# EAGLE board gimbal (EAGLE 6.5.0)
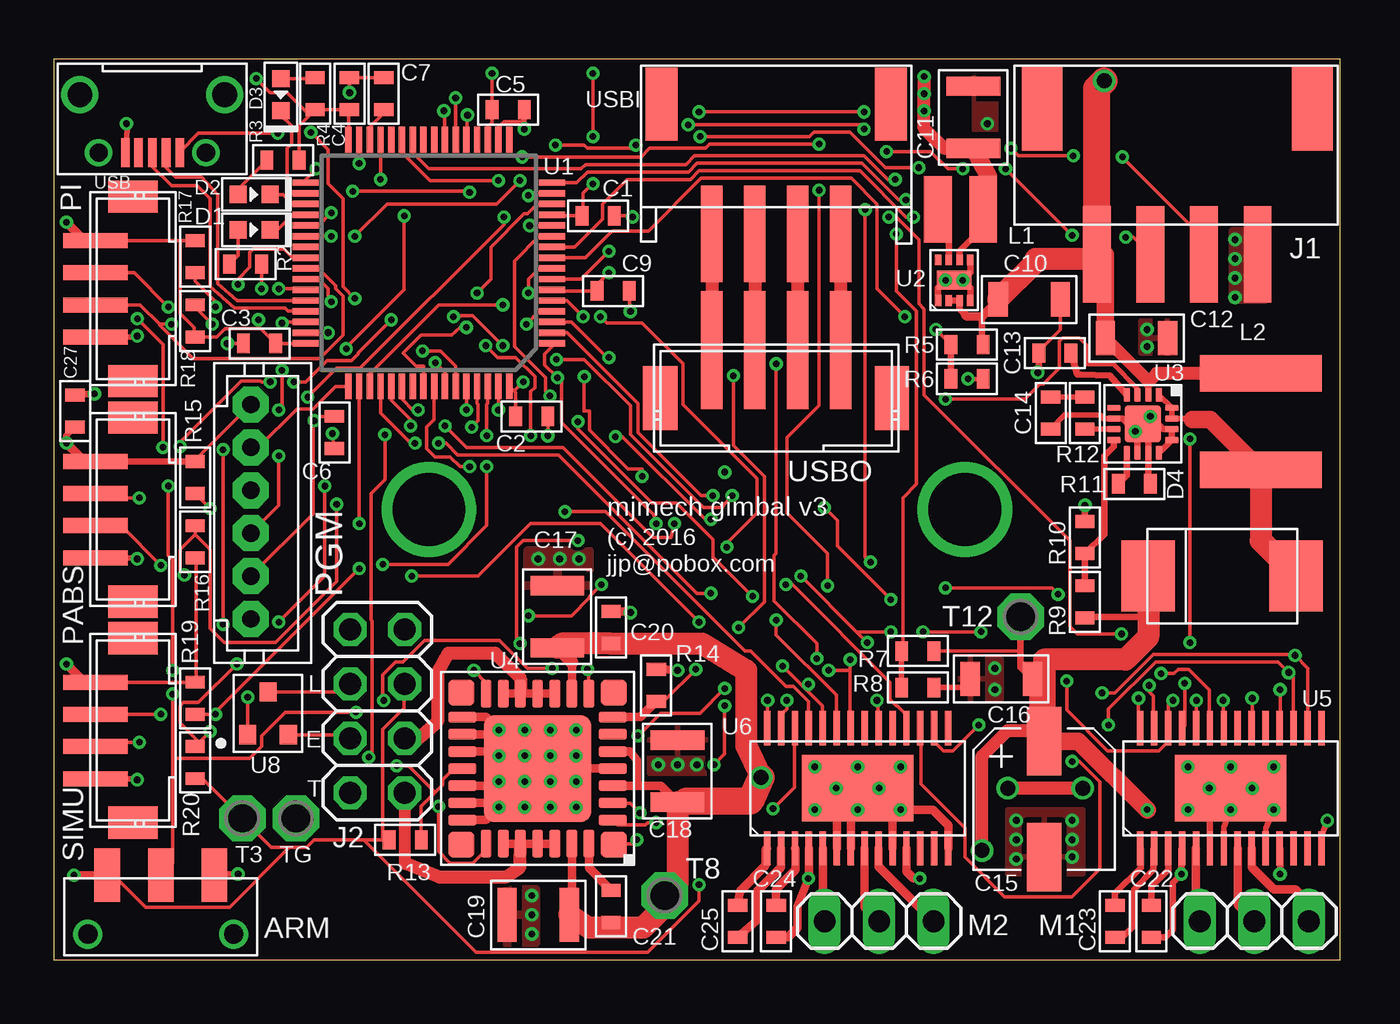
[diagram p0: board, top side]
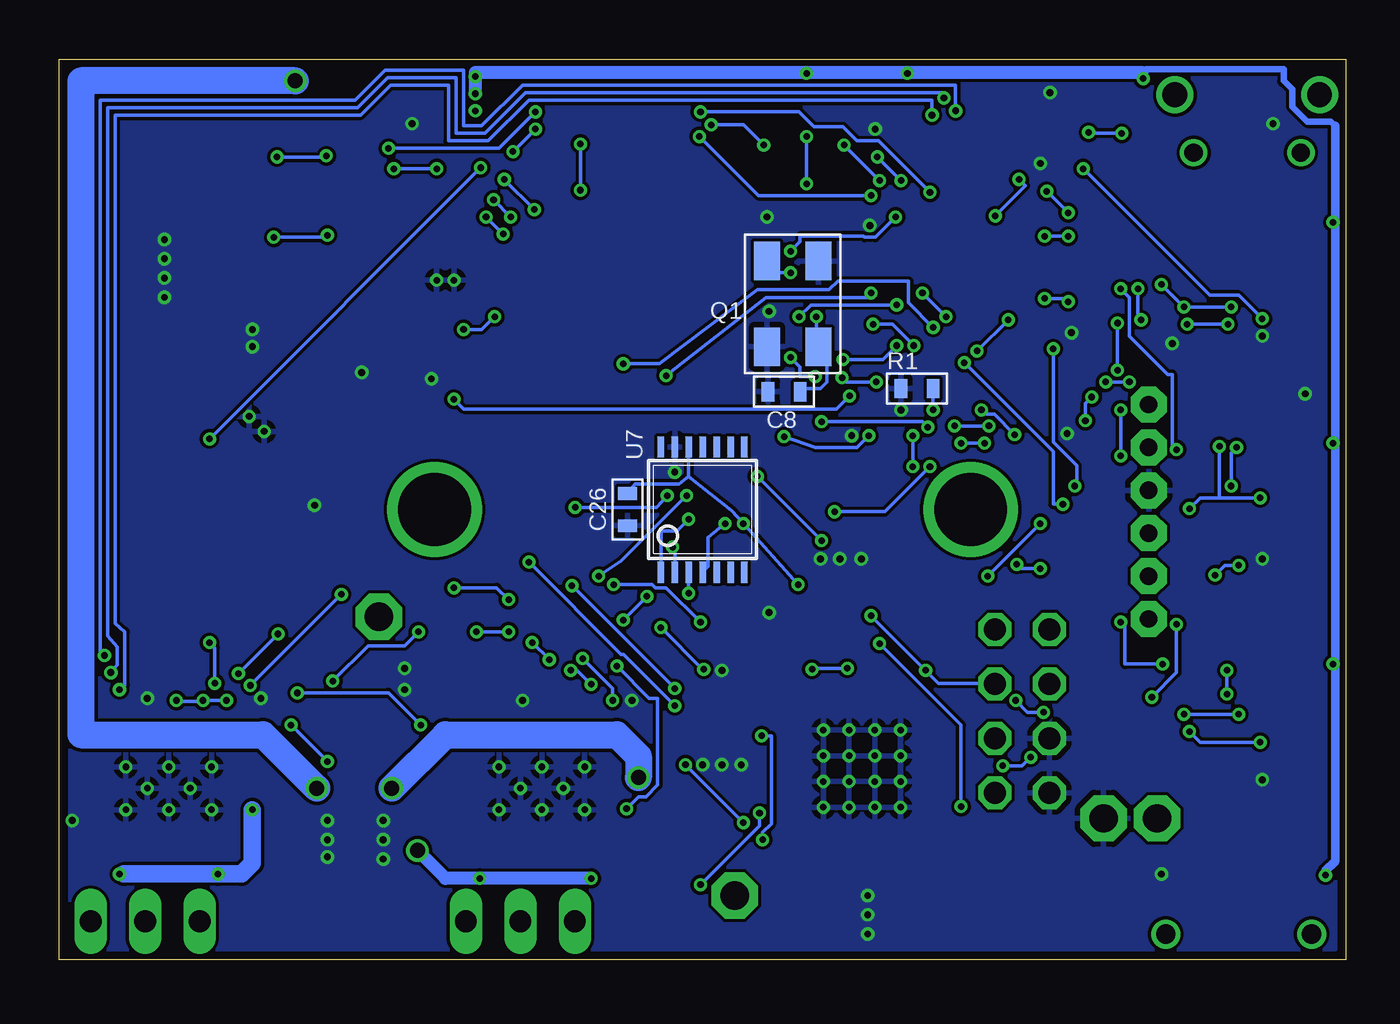
[diagram p1: board, bottom side, seen from below]

Size 60 x 42 mm. Coordinates in mm from the lower left corner, seen from the top.
Outline: 0,0 60,0 60,42 0,42 0,0
Copper layers (1*16): Top 0.035mm / dielectric 0.2mm / Bottom 0.035mm
Design rules "MF_2_Layer *": minimum track width 6mil, minimum drill 12mil, track to track 6mil, track to pad 6mil, pad to pad 6mil, via to via 6mil, smd to smd 0mil, copper to edge 10mil, drill to drill 10mil, minimum pad ring 6mil, minimum via ring 6mil, stop-mask expansion 2mil, vias tented up to drill 25mil, thermal gap 10mil

## Footprints (pad centres in the part's own frame; a part is rotated, then mirrored left to right if it is on the bottom)
JS_SUB_SWITCH = smd 1.2 x 2.5: 1 -2.5,2.75; 2 0,2.75; 3 2.5,2.75 | drill 0.9: G0 -3.4,0; G1 3.4,0
C0603 = smd 0.6 x 0.9: P$1 -0.75,0; P$2 0.75,0
C1206 = smd 0.9 x 1.6: P$1 -1.45,0; P$2 1.45,0
C1210 = smd 0.9 x 2.5: P$1 -1.45,0; P$2 1.45,0
CP6.3MM = smd 1.6 x 3.2: P$1 0,-2.7; P$2 0,2.7
LED0603 = smd 0.8 x 0.8: ANODE 0.75,0; CATHODE -0.75,0
B520C = smd 2.5 x 3.3: 1 -3.45,0; 2 3.45,0
JST_XH_SMT_RA_4 = smd 1.3 x 4.5: 1 -3.75,4.6; 2 -1.25,4.6; 3 1.25,4.6; 4 3.75,4.6 | smd 1.9 x 3.9: SHLD1 -6.3,-2.2; SHLD2 6.3,-2.2
2X04 = drill 1.016 octagon: 1 -3.81,-1.27; 2 -3.81,1.27; 3 -1.27,-1.27; 4 -1.27,1.27; 5 1.27,-1.27; 6 1.27,1.27; 7 3.81,-1.27; 8 3.81,1.27
L_SMT_1212 = smd 1.3 x 3.1: P$1 -1.05,0; P$2 1.05,0
ASPI-6045S = smd 1.7 x 5.7: 1 -2.25,0; 2 2.25,0
1X03 = drill 1.016 long: 1 -2.54,0; 2 0,0; 3 2.54,0
M3_MOTOR_MOUNT = drill 3.4: P$1 0,0
JST_ZH_SMT_VERT_4 = smd 0.7 x 3: 1 -2.25,-0.75; 2 -0.75,-0.75; 3 0.75,-0.75; 4 2.25,-0.75 | smd 1.5 x 2.3: SHLD1 -4.3,1; SHLD2 4.3,1
JST-PH6 = drill 0.813 pad 1.676 octagon: 1 5,0; 2 3,0; 3 1,0; 4 -1,0; 5 -3,0; 6 -5,0
ABM3B = smd 1.8 x 1.2: 1 -2,-1.2; 2 2,-1.2; 3 2,1.2; 4 -2,1.2
R0603 = smd 0.6 x 0.9: P$1 -0.75,0; P$2 0.75,0
P1-13 = drill 1.321 pad 2.159 octagon: TP 0,0
LQFP64 = smd 1.2 x 0.3: 1 -5.75,3.75; 2 -5.75,3.25; 3 -5.75,2.75; 4 -5.75,2.25; 5 -5.75,1.75; 6 -5.75,1.25; 7 -5.75,0.75; 8 -5.75,0.25; 9 -5.75,-0.25; 10 -5.75,-0.75; 11 -5.75,-1.25; 12 -5.75,-1.75; 13 -5.75,-2.25; 14 -5.75,-2.75; 15 -5.75,-3.25; 16 -5.75,-3.75; 33 5.75,-3.75; 34 5.75,-3.25; 35 5.75,-2.75; 36 5.75,-2.25; 37 5.75,-1.75; 38 5.75,-1.25; 39 5.75,-0.75; 40 5.75,-0.25; 41 5.75,0.25; 42 5.75,0.75; 43 5.75,1.25; 44 5.75,1.75; 45 5.75,2.25; 46 5.75,2.75; 47 5.75,3.25; 48 5.75,3.75 | smd 0.3 x 1.2: 17 -3.75,-5.75; 18 -3.25,-5.75; 19 -2.75,-5.75; 20 -2.25,-5.75; 21 -1.75,-5.75; 22 -1.25,-5.75; 23 -0.75,-5.75; 24 -0.25,-5.75; 25 0.25,-5.75; 26 0.75,-5.75; 27 1.25,-5.75; 28 1.75,-5.75; 29 2.25,-5.75; 30 2.75,-5.75; 31 3.25,-5.75; 32 3.75,-5.75; 49 3.75,5.75; 50 3.25,5.75; 51 2.75,5.75; 52 2.25,5.75; 53 1.75,5.75; 54 1.25,5.75; 55 0.75,5.75; 56 0.25,5.75; 57 -0.25,5.75; 58 -0.75,5.75; 59 -1.25,5.75; 60 -1.75,5.75; 61 -2.25,5.75; 62 -2.75,5.75; 63 -3.25,5.75; 64 -3.75,5.75
PWSON8 = smd 0.5 x 0.3: 1 -0.95,0.75; 2 -0.95,0.25; 3 -0.95,-0.25; 4 -0.95,-0.75; 5 0.95,-0.75; 6 0.95,-0.25; 7 0.95,0.25; 8 0.95,0.75 | smd 0.9 x 1.6: G0 0,0 | drill 0.305 pad 0.61: G1 0,0.4; G2 0,-0.4
PQFN16 = smd 0.65 x 0.3: 1 -1.35,0.75; 2 -1.35,0.25; 3 -1.35,-0.25; 4 -1.35,-0.75; 9 1.35,-0.75; 10 1.35,-0.25; 11 1.35,0.25; 12 1.35,0.75 | smd 0.3 x 0.65: 5 -0.75,-1.35; 6 -0.25,-1.35; 7 0.25,-1.35; 8 0.75,-1.35; 13 0.75,1.35; 14 0.25,1.35; 15 -0.25,1.35; 16 -0.75,1.35 | smd 1.7 x 1.7: G0 0,0 | drill 0.305: G1 -0.35,0.35; G2 0.35,-0.35
PQFN32 = smd 1.2 x 1.2: 1 -3.55,3.55; 9 -3.55,-3.55; 17 3.55,-3.55; 25 3.55,3.55 | smd 1.3 x 0.5: 2 -3.5,2.4; 3 -3.5,1.6; 4 -3.5,0.8; 5 -3.5,0; 6 -3.5,-0.8; 7 -3.5,-1.6; 8 -3.5,-2.4; 18 3.5,-2.4; 19 3.5,-1.6; 20 3.5,-0.8; 21 3.5,0; 22 3.5,0.8; 23 3.5,1.6; 24 3.5,2.4 | smd 0.5 x 1.3: 10 -2.4,-3.5; 11 -1.6,-3.5; 12 -0.8,-3.5; 13 0,-3.5; 14 0.8,-3.5; 15 1.6,-3.5; 16 2.4,-3.5; 26 2.4,3.5; 27 1.6,3.5; 28 0.8,3.5; 29 0,3.5; 30 -0.8,3.5; 31 -1.6,3.5; 32 -2.4,3.5 | smd 5 x 5: G0 0,0 | drill 0.305: G1 -1.8,1.8; G2 -0.6,1.8; G3 0.6,1.8; G4 1.8,1.8; G5 -1.8,0.6; G6 -0.6,0.6; G7 0.6,0.6; G8 1.8,0.6; G9 -1.8,-0.6; G10 -0.6,-0.6; G11 0.6,-0.6; G12 1.8,-0.6; G13 -1.8,-1.8; G14 -0.6,-1.8; G15 0.6,-1.8; G16 1.8,-1.8
HTSSOP28 = smd 1.6 x 0.3: 1 -2.8,4.225; 2 -2.8,3.575; 3 -2.8,2.925; 4 -2.8,2.275; 5 -2.8,1.625; 6 -2.8,0.975; 7 -2.8,0.325; 8 -2.8,-0.325; 9 -2.8,-0.975; 10 -2.8,-1.625; 11 -2.8,-2.275; 12 -2.8,-2.925; 13 -2.8,-3.575; 14 -2.8,-4.225; 15 2.8,-4.225; 16 2.8,-3.575; 17 2.8,-2.925; 18 2.8,-2.275; 19 2.8,-1.625; 20 2.8,-0.975; 21 2.8,-0.325; 22 2.8,0.325; 23 2.8,0.975; 24 2.8,1.625; 25 2.8,2.275; 26 2.8,2.925; 27 2.8,3.575; 28 2.8,4.225 | smd 3.1 x 5.2: G0 0,0 | drill 0.305: G1 -1,2; G2 1,2; G3 0,1; G4 -1,0; G5 1,0; G6 0,-1; G7 -1,-2; G8 1,-2
TSSOP14 = smd 0.305 x 0.991: 1 -1.95,-2.918; 2 -1.3,-2.918; 3 -0.65,-2.918; 4 0,-2.918; 5 0.65,-2.918; 6 1.3,-2.918; 7 1.95,-2.918; 8 1.95,2.918; 9 1.3,2.918; 10 0.65,2.918; 11 0,2.918; 12 -0.65,2.918; 13 -1.3,2.918; 14 -1.95,2.918
SOT-23-3 = smd 0.8 x 0.9: P$1 -0.95,-1; P$2 0.95,-1; P$3 0,1
FCI_MICROUSB_SMT_RA = smd 0.4 x 1.35: 1 -1.3,1.5; 2 -0.65,1.5; 3 0,1.5; 4 0.65,1.5; 5 1.25,1.5 | drill 0.85: G0 -2.5,1.5; G1 2.5,1.5 | drill 1.15: G2 -3.375,-1.2; G3 3.375,-1.2
JST_PH_SMT_RA_4 = smd 1 x 4.5: 1 -3,2.75; 2 -1,2.75; 3 1,2.75; 4 3,2.75 | smd 1.5 x 3.4: SHLD1 -5.35,-3.3; SHLD2 5.35,-3.3
JST_PH_SMT_VERT_4 = smd 1 x 5.5: 1 -3,-1.75; 2 -1,-1.75; 3 1,-1.75; 4 3,-1.75 | smd 1.6 x 3: SHLD1 -5.4,0.5; SHLD2 5.4,0.5

## Placement (x,y rotation side)
ARM  SLIDE_SWITCHJS_SUB_SWITCH  [JS_SUB_SWITCH]  5,1.2 0 top
C1  4.7uF  [C0603]  25.4,34.7 0 top
C2  0.1uF  [C0603]  22.3,25.35 0 top
C3  0.1uF  [C0603]  9.6,28.75 180 top
C4  0.1uF  [C0603]  13.8,40.4 90 top
C5  0.1uF  [C0603]  21.2,39.65 0 top
C6  0.1uF  [C0603]  13.1,24.6 270 top
C7  4.7uF  [C0603]  15.4,40.4 90 top
C8  10pF  [C0603]  26.2,26.5 180 bottom
C9  10pF  [C0603]  26.1,31.2 0 top
C10  10uF  [C1206]  45.5,30.8 0 top
C11  22uF 16V  [C1210]  42.9,39.3 90 top
C12  10uF  [C1206]  50.5,29 0 top
C13  0.047uF  [C0603]  46.7,28.3 180 top
C14  0.1uF  [C0603]  46.5,25.5 270 top
C15  100uF  [CP6.3MM]  46.2,7.5 180 top
C16  10uF  [C1206]  44.2,13.1 180 top
C17  22uF 16V  [C1210]  23.5,16 90 top
C18  22uF 16V  [C1210]  29.1,8.8 90 top
C19  22uF 16V  [C1210]  22.6,2.1 180 top
C20  0.1uF  [C0603]  26,15.5 90 top
C21  0.1uF  [C0603]  26,2.5 90 top
C22  0.1uF  [C0603]  51.2,1.8 90 top
C23  0.01uF  [C0603]  49.5,1.8 270 top
C24  0.1uF  [C0603]  33.7,1.8 90 top
C25  0.01uF  [C0603]  31.9,1.8 270 top
C26  0.1uF  [C0603]  33.5,21 270 bottom
C27  0.1uF  [C0603]  1,25.6 90 top
D1  [LED0603]  9.35,34.05 180 top
D2  [LED0603]  9.35,35.7 180 top
D3  [LED0603]  10.6,40.35 90 top
D4  DIODEB520C  [B520C]  54.5,17.9 0 top
J1  JST-XH4SMT_RA  [JST_XH_SMT_RA_4]  52.4,37.5 180 top
J2  [2X04]  15.1,11.6 90 top
L1  2.2uH  [L_SMT_1212]  42.3,35 0 top
L2  2.2uH  [ASPI-6045S]  56.3,25.1 270 top
M1  [1X03]  56,1.8 0 top
M2  [1X03]  38.5,1.8 0 top
MOUNT1  M3_MOTOR_MOUNT  [M3_MOTOR_MOUNT]  42.5,21 0 top
MOUNT2  M3_MOTOR_MOUNT  [M3_MOTOR_MOUNT]  17.5,21 0 top
PABS  JST-ZH4  [JST_ZH_SMT_VERT_4]  2.7,21 270 top
PGM  JST-PH6JST-PH6  [JST-PH6]  9.2,20.9 270 top
PI  JST-ZH4  [JST_ZH_SMT_VERT_4]  2.7,31.3 270 top
Q1  [ABM3B]  25.8,30.6 90 bottom
R1  10  [R0603]  20,26.65 0 bottom
R2  560  [R0603]  8.95,32.45 0 top
R3  560  [R0603]  10.7,37.3 0 top
R4  560  [R0603]  12.2,40.4 270 top
R5  100k  [R0603]  42.6,28.7 0 top
R6  10k  [R0603]  42.6,27.1 180 top
R7  100k  [R0603]  40.3,14.4 0 top
R8  10k  [R0603]  40.3,12.7 180 top
R9  88.7k  [R0603]  48.1,16.7 270 top
R10  10k  [R0603]  48.1,19.7 270 top
R11  78.7k  [R0603]  50.4,22.2 180 top
R12  1.87k  [R0603]  48.1,25.5 270 top
R13  100k  [R0603]  16.4,5.6 180 top
R14  220  [R0603]  28.1,12.8 270 top
R15  1.69k  [R0603]  6.6,22.5 90 top
R16  1.69k  [R0603]  6.6,19.5 270 top
R17  1.69k  [R0603]  6.6,32.8 90 top
R18  1.69k  [R0603]  6.6,29.8 270 top
R19  1.69k  [R0603]  6.6,12.2 90 top
R20  1.69k  [R0603]  6.6,9.2 270 top
SIMU  JST-ZH4  [JST_ZH_SMT_VERT_4]  2.7,10.7 270 top
T3  TPPAD1-13  [P1-13]  8.8,6.6 0 top
T8  TPPAD1-13  [P1-13]  28.5,3 0 top
T12  TPPAD1-13  [P1-13]  45.1,16 0 top
TG  TPPAD1-13  [P1-13]  11.3,6.6 0 top
U1  STM32F4R_64PIN  [LQFP64]  17.5,32.5 180 top
U2  TPS62172PWSON8  [PWSON8]  42,31.7 90 top
U3  TPS55330PQFN16  [PQFN16]  50.8,25 270 top
U4  MC33926  [PQFN32]  22.57,8.92 180 top
U5  DRV8313  [HTSSOP28]  54.9,8 90 top
U6  DRV8313  [HTSSOP28]  37.5,8 90 top
U7  AS5048A  [TSSOP14]  30,21 0 bottom
U8  [SOT-23-3]  10,11.5 0 top
USB  MICRO-USB  [FCI_MICROUSB_SMT_RA]  4.6,39.15 180 top
USBI  [JST_PH_SMT_RA_4]  33.7,36.6 180 top
USBO  [JST_PH_SMT_VERT_4]  33.7,26.7 180 top

## Library data of the parts
ARM = gimbal; AMFPN: JS102011SAQN; DPN: 401-1999-1-ND
C1 C7 = mfpassives; AMFPN: CC0603KRX5R6BB475; DPN: 311-1455-1-ND; MFG#: N/A; TEMP_COF: N/A; TOLERANCE: N/A; VOLTAGE: N/A
C2-C6 C14 C20-C22 C24 C26 C27 = mfpassives; AMFPN: MF-CAP-0603-0.1uF; MFG#: N/A; TEMP_COF: N/A; TOLERANCE: N/A; VOLTAGE: N/A
C8 C9 = mfpassives; AMFPN: MF-CAP-0603-10pF; MFG#: N/A; TEMP_COF: N/A; TOLERANCE: N/A; VOLTAGE: N/A
C10 C12 C16 = mfpassives; AMFPN: MF-CAP-1206-10uF; MFG#: N/A; TEMP_COF: N/A; TOLERANCE: N/A; VOLTAGE: N/A
C11 C17-C19 = mfpassives; AMFPN: C3225X7R1C226M250AC; DPN: 445-3955-1-ND; MFG#: N/A; TEMP_COF: N/A; TOLERANCE: N/A; VOLTAGE: N/A
C13 = mfpassives; AMFPN: GRM188R71E473KA01D; DPN: 490-1522-1-ND; MFG#: N/A; TEMP_COF: N/A; TOLERANCE: N/A; VOLTAGE: N/A
C15 = mfpassives; AMFPN: MF-CAP-6.3MM-100uF; MFG#: N/A; TOLERANCE: N/A; VOTLAGE: N/A
C23 C25 = mfpassives; AMFPN: MF-CAP-0603-0.01uF; MFG#: N/A; TEMP_COF: N/A; TOLERANCE: N/A; VOLTAGE: N/A
D1 = mfleds; AMFPN: MF-LED-0603-GREEN; MFG#: N/A
D2 D3 = mfleds; AMFPN: MF-LED-0603-RED; MFG#: N/A
D4 = gimbal; AMFPN: B520C-13-F; DPN: B520C-FDICT-ND
J1 = gimbal; AMFPN: S4B-XH-SM4-TB(LF)(SN); DPN: 455-2262-1-ND
J2 M1 M2 = pinhead
L1 = gimbal; AMFPN: LQH3NPN2R2MJ0L; DPN: 490-6638-1-ND
L2 = gimbal; AMFPN: ASPI-6045S-2R2N-T; DPN: ASPI-6045S-2R2N-TCT-ND
MOUNT1 MOUNT2 = gimbal
PABS PI SIMU = gimbal; AMFPN: B4B-ZR-SM4-TF(LF)(SN); DPN: 455-1683-1-ND
PGM = gimbal; AMFPN: B6B-PH-K-S(LF)(SN); DPN: 455-1708-ND
Q1 = gimbal; AMFPN: ABM3B-8.000MHZ-10-1-U-T; DPN: 535-9721-1-ND
R1 = mfpassives; AMFPN: MF-RES-0603-10; MFG#: N/A; TOLERANCE: N/A; VOLTAGE: N/A; WATTAGE: N/A
R2-R4 = mfpassives; AMFPN: MF-RES-0603-560; MFG#: N/A; TOLERANCE: N/A; VOLTAGE: N/A; WATTAGE: N/A
R5 R7 R13 = mfpassives; AMFPN: ERJ-3EKF1003V; DPN: P100KHCT-ND; MFG#: N/A; TOLERANCE: N/A; VOLTAGE: N/A; WATTAGE: N/A
R6 R8 = mfpassives; AMFPN: ERJ-3EKF1002V; DPN: P10.0KHCT-ND; MFG#: N/A; TOLERANCE: N/A; VOLTAGE: N/A; WATTAGE: N/A
R9 = mfpassives; AMFPN: ERJ-3EKF8872V; DPN: P88.7KHCT-ND; MFG#: N/A; TOLERANCE: N/A; VOLTAGE: N/A; WATTAGE: N/A
R10 = mfpassives; AMFPN: P10.0KHCT-ND; DPN: P10.0KHCT-ND; MFG#: N/A; TOLERANCE: N/A; VOLTAGE: N/A; WATTAGE: N/A
R11 = mfpassives; AMFPN: ERJ-3EKF7872V; DPN: P78.7KHCT-ND; MFG#: N/A; TOLERANCE: N/A; VOLTAGE: N/A; WATTAGE: N/A
R12 = mfpassives; AMFPN: ERJ-3EKF1871V; DPN: P1.87KHCT-ND; MFG#: N/A; TOLERANCE: N/A; VOLTAGE: N/A; WATTAGE: N/A
R14 = mfpassives; AMFPN: ERJ-3EKF2200V; DPN: P220HCT-ND; MFG#: N/A; TOLERANCE: N/A; VOLTAGE: N/A; WATTAGE: N/A
R15-R20 = mfpassives; AMFPN: MF-RES-0603-1.69K; MFG#: N/A; TOLERANCE: N/A; VOLTAGE: N/A; WATTAGE: N/A
T3 T8 T12 TG = testpad
U1 = gimbal; AMFPN: STM32F411RET6; DPN: 497-14909-ND
U2 = gimbal; AMFPN: TPS62172DSGT; DPN: 296-29879-1-ND
U3 = gimbal; AMFPN: TPS55330RTET; DPN: 296-36219-1-ND
U4 = gimbal; AMFPN: MC33926PNBR2; DPN: MC33926PNBR2CT-ND
U5 U6 = gimbal; AMFPN: DRV8313PWP; DPN: 296-35540-5-ND
U7 = gimbal; AMFPN: AS5048A-HTSP-500; DPN: AS5048A-HTSP-500CT-ND
U8 = mfdiscrete; AMFPN: MF-DSC-SOT233-BSS138
USB = gimbal; AMFPN: 10118194-0001LF; DPN: 609-4618-1-ND
USBI = gimbal; AMFPN: S4B-PH-SM4-TB(LF)(SN); DPN: 455-1751-1-ND
USBO = gimbal; AMFPN: B4B-PH-SM4-TB(LF)(SN); DPN: 455-1736-1-ND

## Nets
+3V3: ARM.1 C1.P$1 C2.P$1 C3.P$1 C4.P$1 C5.P$1 C11.P$1 C26.P$1 C27.P$1 J2.5 L1.P$2 PABS.1 PGM.6 PI.1 R2.P$2 R3.P$2 R4.P$2 R13.P$2 R15.P$2 R16.P$2 R17.P$2 R18.P$2 R19.P$2 R20.P$2 SIMU.1 T3.TP U1.1 U1.13 U1.19 U1.32 U1.48 U1.64 U2.6 U4.3 U4.16 U7.12
+8V: C10.P$1 C12.P$1 C17.P$1 C18.P$1 C19.P$1 C20.P$1 C21.P$1 J1.4 L2.1 R5.P$2 T8.TP U2.2 U2.3 U3.2 U4.4 U4.6 U4.11 U4.31
+12V: C15.P$1 C16.P$1 C22.P$1 C24.P$1 D4.1 R7.P$2 R9.P$2 T12.TP U5.4 U5.11 U6.4 U6.11
AEG_PWM: U1.26 U4.2
AGITATOR_PWM: U1.27 U4.1
AS5048_CS: U1.4 U7.1
AS5048_MISO: U1.52 U7.3
AS5048_MOSI: U1.53 U7.4
AS5048_SCK: U1.51 U7.2
BLDC_EN: U1.2 U5.22 U5.24 U5.26 U6.22 U6.24 U6.26
BLDC_FAULT1: U1.21 U5.18
BLDC_FAULT2: U1.50 U6.18
BLDC_RESET/: U1.23 U5.16 U6.16
BLDC_SLEEP/: U1.22 U5.17 U6.17
BOOST_EN: U1.11 U3.3
GND: ARM.3 C1.P$2 C2.P$2 C3.P$2 C4.P$2 C5.P$2 C6.P$2 C7.P$2 C8.P$2 C9.P$2 C10.P$2 C11.P$2 C12.P$2 C13.P$2 C14.P$2 C15.P$2 C16.P$2 C17.P$2 C18.P$2 C19.P$2 C20.P$2 C26.P$2 C27.P$2 J1.1 J2.2 J2.4 PABS.4 PGM.4 PI.4 Q1.2 Q1.4 R1.P$1 R6.P$1 R8.P$1 R10.P$1 R11.P$1 R14.P$1 SIMU.4 TG.TP U1.12 U1.18 U1.31 U1.47 U1.63 U2.1 U2.4 U2.5 U2.G0 U2.G1 U2.G2 U3.6 U3.10 U3.11 U3.12 U3.13 U3.14 U3.G0 U3.G1 U3.G2 U4.5 U4.18 U4.19 U4.20 U4.22 U4.23 U4.24 U4.G0 U4.G1 U4.G2 U4.G3 U4.G4 U4.G5 U4.G6 U4.G7 U4.G8 U4.G9 U4.G10 U4.G11 U4.G12 U4.G13 U4.G14 U4.G15 U4.G16 U5.6 U5.7 U5.10 U5.14 U5.20 U5.28 U5.G0 U5.G1 U5.G2 U5.G3 U5.G4 U5.G5 U5.G6 U5.G7 U5.G8 U6.6 U6.7 U6.10 U6.14 U6.20 U6.28 U6.G0 U6.G1 U6.G2 U6.G3 U6.G4 U6.G5 U6.G6 U6.G7 U6.G8 U7.13 U8.P$2 USB.5
LASER_EN: U1.43 U8.P$1
MOTOR1_IN1: U1.14 U5.27
MOTOR1_IN2: U1.15 U5.25
MOTOR1_IN3: U1.16 U5.23
MOTOR2_IN1: U1.56 U6.27
MOTOR2_IN2: U1.57 U6.25
MOTOR2_IN3: U1.61 U6.23
MOTOR_D1: U1.3 U4.26
MOTOR_EN: ARM.2 U1.33 U4.10
MOTOR_FB: R14.P$2 U1.8 U4.8
MOTOR_SF: R13.P$1 U1.54 U4.21
N$1: J2.6 U8.P$3
N$2: J2.3 U4.12 U4.13 U4.14 U4.15
N$3: J2.1 U4.27 U4.28 U4.29 U4.30
N$5: C21.P$2 U4.32
N$6: M1.1 U5.5
N$7: M1.2 U5.8
N$8: M1.3 U5.9
N$9: M2.1 U6.5
N$10: M2.2 U6.8
N$11: M2.3 U6.9
N$12: USBI.1 USBO.1
N$13: USBI.2 USBO.2
N$14: USBI.3 USBO.3
N$15: USBI.4 USBO.4
N$16: L1.P$1 U2.7
N$17: D4.2 L2.2 U3.1 U3.15 U3.16
N$18: R11.P$2 U3.9
N$19: C14.P$1 R12.P$1
N$20: R12.P$2 U3.7
N$21: C13.P$1 U3.4
N$22: R9.P$1 R10.P$2 U3.8
N$23: C7.P$1 U1.30
N$24: C6.P$1 PGM.2 U1.7
N$25: C25.P$1 U6.1
N$26: C25.P$2 U6.2
N$27: C23.P$2 U5.2
N$28: C23.P$1 U5.1
N$29: C22.P$2 U5.3
N$30: C24.P$2 U6.3
N$31: PGM.5 U1.49
N$32: PGM.3 U1.46
N$33: R1.P$2 U1.60
N$34: R5.P$1 R6.P$2 U1.9
N$35: C8.P$1 Q1.1 U1.5
N$36: C9.P$1 Q1.3 U1.6
N$37: D2.CATHODE U1.35
N$38: R7.P$1 R8.P$2 U1.10
N$39: D1.ANODE R2.P$1
N$40: D2.ANODE R3.P$1
N$41: D3.ANODE R4.P$1
N$42: D3.CATHODE U1.34
N$43: D1.CATHODE U1.36
PABS_SCL: PABS.3 R16.P$1 U1.58
PABS_SDA: PABS.2 R15.P$1 U1.59
PIMU_SCL: PI.3 R18.P$1 U1.41
PIMU_SDA: PI.2 R17.P$1 U1.40
SIMU_SCL: R20.P$1 SIMU.3 U1.29
SIMU_SDA: R19.P$1 SIMU.2 U1.62
SLAVE_RX: J1.3 U1.38
SLAVE_TX: J1.2 U1.37
USB_DM: U1.44 USB.2
USB_DP: U1.45 USB.3
USB_VBUS: U1.42 USB.1

## Tracks (layer width: path | path; a pad name or v marks a point on that pad's centre or on a via)
+3V3  (via drill 0.3)
  Top 0.152: 9.55,29.45 9.65,29.45 C3.P$1 U1.48 | 9.55,29.45 8,29.45 7.6,29.05 R18.P$2 6.55,29.1 6.55,29.5 5.9,30.15 5.9,33.55 | v9.7,31.3 R2.P$2 | 9.55,29.45 v9.55,29.85 | R3.P$2 11.45,38.9 R4.P$2 | R4.P$2 C4.P$1 13.75,39.6 U1.32 | SIMU.1 R19.P$2 6.65,13 6.65,18.7 R16.P$2 | U1.13 23.3,34.7 C1.P$1 24.7,34.75 24.7,35.75 v25.15,36.2 | U1.19 20.25,38.85 20.45,39.05 C5.P$1 v20.45,41.35 | PI.1 5.9,33.55 | 5.9,33.55 R17.P$2 | v25.15,41.35 v25.15,38.4 | v9.45,41.1 10.1,40.45 10.9,40.45 11.9,39.45 R4.P$2 | C2.P$1 21.55,26.45 21.48,26.52 | U1.64 21.48,26.52 | U1.1 23.25,28.6 22.9,28.25 22.9,27.75 v23.5,27.15 23.7,26.95 23.7,25.05 28,20.75 v28.1,20.35 | 21.48,26.52 v21.9,26.95 | v19.6,13.5 20.15,12.95 20.15,12.5 U4.16 | 14.5,5.6 12.15,5.6 11.8,5.25 10.95,5.25 | 14.5,5.6 15.35,5.6 | 15.35,5.6 R13.P$2 | 10.95,5.25 10.15,5.25 T3.TP 6.95,8.45 R20.P$2 | v27.35,6.85 26.9,7.3 26.1,7.3 U4.3 | v30.1,3.5 30.1,2.75 27.7,0.35 19.7,0.35 14.5,5.55 14.5,5.6 | 15.35,5.6 15.35,10.75 16.35,11.75 16.35,12.85 J2.5 | v25.55,17.5 25,16.95 25,16.9 24.15,16.05 v22.15,16.05 | ARM.1 2.7,3.9 2.85,3.9 4.3,2.45 8.2,2.45 10.95,5.2 10.95,5.25 | PGM.6 6.65,23.35 R15.P$2
  Top 0.2: U4.16 20.2,12.42
  Top 0.305: 43.6,35.25 L1.P$2 42.9,34.55 42.9,33.7 42.25,33.05 U2.6 | R15.P$2 PABS.1 | v0.6,24.1 0.6,24.45 C27.P$1
  Top 0.406: SIMU.1 1.45,12.95 v0.6,13.8 | PABS.1 1.45,23.25 v0.6,24.1 | PI.1 1.45,33.55 v0.6,34.4 | ARM.1 v0.95,3.95
  Top 0.61: C11.P$1 41.55,37.85 40.6,38.8 v40.6,39.6 v40.6,40.4 v40.6,41.2
  Top 0.813: 43.6,35.25 43.6,36.55 C11.P$1
  Bottom 0.152: v9.7,31.3 9.7,29.85 v9.55,29.85 | v20.45,41.35 20.45,41.4 | v25.15,38.4 v25.15,36.2 | v25.15,41.35 25.15,41.4 | v0.6,13.8 0.5,13.8 | v9.45,41.1 9.5,41.4 | v0.6,24.1 0.5,24.1 | C26.P$1 33.15,22.2 31.1,22.2 30.65,22.55 | U7.12 30.65,22.55 | v23.5,27.15 23.3,26.95 v21.9,26.95 | 30.65,22.55 28.65,20.95 v28.1,20.35 v25.55,17.5 | J2.5 16.4,12.9 19,12.9 v19.6,13.5 v22.15,16.05 | v27.35,6.85 27.35,6.25 v30.1,3.5
  Bottom 0.305: 9.5,41.4 9.3,41.55 2.9,41.55 2.9,41 2.5,40.6 2.5,39.8 1.8,39.1 0.7,39.1 0.5,38.9
  Bottom 0.406: 0.5,34.5 0.5,24.1 0.5,13.8 0.5,4.6 0.95,4.15 v0.95,3.95 | 0.5,38.9 0.5,34.5 | 0.5,34.5 v0.6,34.4
  Bottom 0.61: v40.6,40.4 40.6,41.4 25.15,41.4 20.45,41.4 9.5,41.4
+8V  (via drill 0.7)
  Top 0.254: C21.P$1 25.75,1.75 25.5,1.5
  Top 0.305: 51,27 51.05,26.95 U3.2 | 42.5,30.1 42.25,30.35 U2.3 U2.2 | R5.P$2 43.3,28.75 43.3,30
  Top 0.406: 51,27.05 51,27 | 24.17,13.88 U4.11 | C19.P$1 24.17,2.72 U4.31 | C18.P$1 28.33,8.12 27.2,8.12 | 27.2,8.12 U4.4 | U4.6 26.88,9.72 27.2,9.3 27.2,8.12 | C10.P$1 44.05,30.75 43.3,30 42.6,30 42.5,30.1
  Top 0.61: C12.P$1 51,27.05 | L2.1 51.45,27.35 51.05,26.95 | v48,8 v44.5,8 | C17.P$1 24.17,13.88
  Top 0.813: J1.4 49.05,32.9 C12.P$1 | 29.5,7.4 29.15,6.9 C18.P$1 | 45.8,32.7 45.8,32.55
  Top 1.016: C18.P$1 29.1,3.6 T8.TP 28.5,2.5 27.5,1.5 25.5,1.5 24.95,1.5 C19.P$1 | v33,8.5 32.3,10 32.3,13.5 30.25,14.75 C20.P$1 23.7,14.75 C17.P$1 | 45.8,32.7 48.55,32.7 48.65,35 | 45.8,32.55 C10.P$1
  Top 1.27: J1.4 48.65,35 48.65,40.65 v49,41 | v33,8.5 32.5,7.4 29.5,7.4
  Bottom 1.27: v49,41 59,41 59,10.5 50.5,10.5 v48,8 | v44.5,8 42,10.5 34,10.5 33,9.5 v33,8.5
+12V  (via drill 0.3, 0.7)
  Top 0.152: 45.1,14.4 R7.P$2
  Top 0.305: C15.P$1 45.65,10.75 C16.P$1 45.1,13.65 45.1,14.4 T12.TP | R9.P$2 48.15,16 51.05,16 | v57.2,4 57.2,5.17 U5.11 | U5.4 52.6,5.17 v52.6,4 52.2,3.6 52.2,1.4 51.85,1.05 C22.P$1
  Top 0.406: U6.11 39.77,4.12 40.1,3.8 v40.4,3.8 | U6.4 35.23,3.92 v35.2,3.8 34.7,2.5 34.7,1.5 34.25,1.05 C24.P$1
  Top 0.61: v43.3,5.1 43.3,9.5 44.5,10.7 45.6,10.7 45.65,10.75
  Top 0.813: C15.P$1 47.8,10.2 v51,7
  Top 1.016: D4.1 51.05,16 51.05,15.05 50,14 46.2,14 C15.P$1
  Bottom 0.305: 57,4 v57.2,4
  Bottom 0.61: v43.3,5.1 42,3.8 v40.4,3.8 v35.2,3.8
  Bottom 0.813: v51,7 51,4.5 51.5,4 v52.6,4 57,4
AEG_PWM  (via drill 0.3)
  Top 0.152: U1.26 16.75,37.65 17.5,36.9 24.6,36.9 24.8,37.1 29.5,37.1 29.9,37.5 37.8,37.5 38.9,36.4 v39.25,36.4 | v37.85,35 37.85,18.8 v38.1,18.55 | v31.3,11.85 31.3,9.6 v30.8,9.1 | v28.1,6.4 27.7,6.4 27.6,6.3 26.3,6.3 26.1,6.5 U4.2
  Bottom 0.152: v37.85,35 v39.25,36.4 | v38.1,18.55 33.8,14.25 33.7,14.25 v31.3,11.85 | v28.1,6.4 v30.8,9.1
AGITATOR_PWM  (via drill 0.3)
  Top 0.152: v27.2,5.6 27,5.4 26.15,5.4 U4.1 | v27.25,10.45 28.3,11.5 30.15,11.5 v31.3,12.65 | v36.1,17.45 36.1,18.95 34.2,20.85 34.2,24.35 35.7,25.85 v35.7,35.9 | v35.7,38.05 30.6,38.05 30.4,37.85 27.8,37.85 27.4,37.45 v21.85,37.45 | v20.75,36.35 17.55,36.35 16.25,37.65 U1.27
  Bottom 0.152: v27.2,5.6 27.2,5.95 26.8,6.35 26.8,10.45 v27.25,10.45 | v36.1,17.45 v31.3,12.65 | v35.7,38.05 v35.7,35.9 | v20.75,36.35 v21.85,37.45
AS5048_CS  (via drill 0.3)
  Top 0.152: v30.65,20.55 30.4,20.55 26.5,24.4 v26.2,24.4 | v22.25,24.45 22.25,26.5 22.45,26.7 22.45,27.2 21.55,28.1 20.7,28.1 v20.15,28.65 | v22.05,29.65 22.65,30.25 U1.4
  Bottom 0.152: U7.1 31.95,20 31.2,20 v30.65,20.55 | v26.2,24.4 24.75,23.9 22.8,23.9 v22.25,24.45 | v20.15,28.65 21.15,29.65 v22.05,29.65
AS5048_MISO  (via drill 0.3)
  Top 0.152: v30.65,17.1 30,17.1 23.55,23.55 18.85,23.55 18.3,24.1 v17.95,24.1 | v16.85,24.1 16.65,24.1 15.25,25.5 U1.52
  Bottom 0.152: v30.65,17.1 U7.3 | v16.85,24.1 v17.95,24.1
AS5048_MOSI  (via drill 0.3)
  Top 0.152: v28.95,20.35 28.8,19.7 27.95,19.7 23.75,23.9 19.25,23.9 v18.25,24.9 | v16.65,24.9 16.65,25.2 15.75,26.1 U1.53
  Bottom 0.152: v28.95,20.35 29.75,19.7 29.75,18.35 30,18.1 U7.4 | v16.65,24.9 v18.25,24.9
AS5048_SCK  (via drill 0.3)
  Top 0.152: v31.4,19.25 31.4,19.45 32.8,20.85 32.8,22.45 29.35,25.9 29.35,27.8 27.45,29.7 25.8,29.7 v25.5,30 | v20.95,30.55 17.95,30.55 14.75,27.35 U1.51
  Bottom 0.152: U7.2 31.3,19.25 v31.4,19.25 | v25.5,30 24.95,30.55 v20.95,30.55
BLDC_EN  (via drill 0.3)
  Top 0.152: v33.55,7.05 34.55,8.05 34.55,10.8 U6.26 | 35,12.7 35.85,11.85 35.85,10.8 U6.24 | 35,12.7 v34,13.7 | v52.2,12.1 52,11.9 52,10.8 U5.26 51.95,10.75 51.95,10.15 51.55,9.75 49.15,9.75 47.25,11.65 v47.25,13 | v53.3,12.1 53.3,10.8 U5.24 | v54.55,12.1 54.55,10.8 U5.22 | U1.2 23.95,29.25 27.25,25.95 27.25,24.6 30.2,21.65 v30.75,21.65 | v37.95,14.8 37.5,15.25 | 37.5,15.25 v34.85,17.9 | 37.15,13.5 37.15,10.8 U6.22 | 37.15,13.5 v37.15,14 | v40.55,15.3 v43.25,15.3 | v39.05,15.3 37.55,15.3 37.5,15.25 | 35,12.7 35.15,12.85 v35.2,12.85 | 37.15,13.5 v36.15,13.5
  Bottom 0.152: v33.55,7.05 33,7.6 32.65,7.6 32.1,8.15 32.1,12.2 32.5,12.2 v34,13.7 | v52.2,12.1 v53.3,12.1 53.35,12.05 54.5,12.05 v54.55,12.1 | v30.75,21.65 33.8,18.6 v34.85,17.9 | v37.15,14 v37.95,14.8 | v47.25,13 45.6,14.65 43.9,14.65 v43.25,15.3 | v39.05,15.3 v40.55,15.3 | v35.2,12.85 35.85,13.5 v36.15,13.5
BLDC_FAULT1  (via drill 0.32)
  Top 0.16: U5.18 57.2,10.82 v57.2,12.6 | v19.3,39.4 U1.21
  Bottom 0.16: v57.2,12.6 56.95,12.8 56.95,15.3 57.4,15.7 57.4,39.4 45.95,39.4 44.55,40.8 41.85,40.8 41.85,38.2 40,38.2 38.1,40.1 19.3,40.1 v19.3,39.4
BLDC_FAULT2  (via drill 0.3)
  Top 0.152: v14.25,20.35 U1.50 | v16.7,17.9 19.8,17.9 22.25,20.35 25.5,20.35 v30.1,15.75 | v34.15,17.5 34.45,17.5 39,12.95 39,12.15 39.3,11.85 39.35,11.85 39.75,11.45 39.75,10.8 U6.18
  Bottom 0.152: v16.7,17.9 v14.25,20.35 | v30.1,15.75 31.7,17.35 32.2,17.35 32.35,17.5 v34.15,17.5
BLDC_RESET/  (via drill 0.3, 0.32)
  Top 0.152: v43.15,10.95 41.95,9.75 41.5,9.75 41.1,10.15 41.1,10.8 U6.16 | v48.9,12.45 49.5,12.45 51.3,14.25 57.85,14.25 v57.9,14.2
  Top 0.16: U5.16 58.5,10.8 58.5,13.6 v57.9,14.2 | v18.2,39.6 U1.23
  Bottom 0.152: v43.15,10.95 44.65,12.45 v48.9,12.45
  Bottom 0.16: v57.9,14.2 58.1,14.4 58.1,40.1 46.2,40.1 44.8,41.5 41.15,41.5 41.15,38.9 40.3,38.9 38.4,40.8 18.2,40.8 v18.2,39.6
BLDC_SLEEP/  (via drill 0.3, 0.32)
  Top 0.152: v47.5,9.25 47.85,9.25 48.8,8.3 48.8,4.25 47.5,2.95 44.35,2.95 42.5,4.8 42.5,6.15 40.45,8.2 40.45,10.8 U6.17 | v49.2,10.95 49.2,11.7 51.4,13.9 57.1,13.9 v57.6,13.4
  Top 0.16: U5.17 57.83,13.18 v57.6,13.4 | v18.75,40.2 U1.22
  Bottom 0.152: v49.2,10.95 v47.5,9.25
  Bottom 0.16: v57.6,13.4 57.3,13.75 57.3,14.6 57.75,15.1 57.75,39.75 46.1,39.75 44.7,41.15 41.5,41.15 41.5,38.55 40.15,38.55 38.25,40.45 18.75,40.45 v18.75,40.2
BOOST_EN  (via drill 0.3)
  Top 0.152: U1.11 22.65,33.75 21.5,32.6 21.5,28.6 22.95,27.15 22.95,26.5 v23.15,26.3 | v41.6,26.15 45.3,26.15 46,26.85 46.15,26.85 46.9,27.6 46.9,28.85 47.05,29 47.85,29 48.25,28.6 48.2,28.5
  Top 0.2: U3.3 50.55,26.65 49.4,27.8
  Top 0.254: 49.4,27.8 48.2,27.8 48.2,28.5
  Bottom 0.152: v23.15,26.3 23.75,25.7 41.15,25.7 v41.6,26.15
GND  (via drill 0.3, 0.32)
  Top 0.152: U8.P$2 13.65,10.5 13.8,10.35 J2.4 | v13,24.55 C6.P$2 | v23.05,24.45 C2.P$2 | v8.1,28.75 C3.P$2 | C9.P$2 26.85,30.3 v26.9,30.25 | C1.P$2 26.95,34.7 v27,34.65 | v13.8,40.45 C4.P$2 C7.P$2 | v12.8,29.25 U1.47 | v20.75,25.65 U1.63 | v14.25,37.15 U1.31 | v22.2,34.25 U1.12 | U1.18 20.75,38.85 21,39.1 21.95,39.1 | v33.3,12.1 33.3,10.8 U6.28 | v38.4,12.1 38.45,12.05 38.45,10.8 U6.20 | v50.6,12.2 50.6,10.9 U5.28 | v55.9,12.2 55.9,10.8 U5.20 | U2.G1 U2.G0 | C10.P$2 46.95,29.4 46,28.45 C13.P$2 | U6.G3 U6.G0 | U5.G3 U5.G0
  Top 0.2: R6.P$1 v42.65,27.1
  Top 0.254: U3.6 48.95,25.25 48.8,25.4 47.15,25.4 C14.P$2 | U5.14 59.12,5.72 v59.4,6.5 | U5.10 56.52,6.12 U5.G7 | U5.7 54.58,6.17 U5.G4 | R8.P$1 42.35,12.7 C16.P$2 | 50.7,10.78 U5.28 | C5.P$2 21.95,39.1 v21.95,38.75 | v8.6,4 7.55,4 ARM.3 | USB.5 3.45,38.95 v3.4,39 | PI.4 3.85,29.05 v3.9,29.1 | PABS.4 3.85,18.75 v3.9,18.7 | SIMU.4 3.85,8.45 v3.9,8.4
  Top 0.305: C13.P$2 45.95,27.45 v45.9,27.4 | U3.G1 51.75,24.75 U3.14 U3.13 U3.12 | U3.6 49.85,25.25 U3.G2 50.55,24.55 U3.10 50.55,24.75 U3.G0 51.05,24.75 U3.11 51.05,22.3 R11.P$1 | R10.P$1 v48.1,21.2 | U5.6 53.92,7.97 U5.G3 | U2.5 42.75,32.05 U2.G2 42.75,31.35 U2.4 | U2.G1 41.25,31.35 U2.1 | v1.9,26.4 1.05,26.4 C27.P$2
  Top 0.406: R14.P$1 28.55,13.55 v29.1,13.5 | C20.P$2 26.85,16.25 v26.9,16.2 | U4.5 24.97,8.92 U4.G9 | U4.19 20.57,10.52 U4.G16 20.17,11.32 U4.18 | U4.G7 U4.G0 | U4.23 20.57,7.32 U4.G4 20.17,6.52 U4.24 | U4.22 20.57,8.12 U4.G8 | U4.20 20.57,9.72 U4.G12 | U6.10 39.12,6.62 arc-90 U6.G7 41,7 41.73,6.28 U6.14 | U6.7 37.17,6.67 arc-90 U6.G4 | U6.6 36.52,7.97 U6.G3
  other vias: 55.1,33.6 55.1,32.7 55.1,31.8 55.1,30.9 51,29.4 51,28.6 44.9,4.7 44.9,5.6 47.5,5.6 47.5,4.8 47.5,6.5 44.9,6.5 22.6,18.7 23.6,18.7 24.5,18.7 22.3,1.2 22.3,2.1 22.3,3 43.9,12.6 43.9,13.6 28.2,9.1 29.1,9.1 30,9.1 43.55,39 31.3,22.75
  pour Bottom: 0.5,41.5 59.5,41.5 59.5,0.5 0.5,0.5
  pour Top (no thermals): 55,34 55,30.8 56.5,30.8 56.5,34
  pour Top: 50.7,29.8 52.1,29.8 52.1,29.7 52.1,28.3 50.7,28.3
  pour Top: 44.5,7 48,7 48,4 44.5,4
  pour Top: 22.1,19.1 22.1,17.3 24.9,17.3 25,17.4 25,19.1
  pour Top: 21.1,3.3 21.1,0.8 22.5,0.8 22.5,3.3
  pour Top: 42.3,14 44.2,14 44.2,12.2 42.3,12.2
  pour Top: 27.8,10.8 27.8,8.7 30.4,8.7 30.4,10.8
  pour Top: 42.9,41.2 42.9,38.7 44,38.7 44,41.2
LASER_EN  (via drill 0.3)
  Top 0.152: v9.05,12.25 U8.P$1 | v7.9,23.8 v7.9,15.65 | v10.5,31.3 11.7,31.3 U1.43
  Bottom 0.152: v9.05,12.25 7.9,13.4 v7.9,15.65 | v7.9,23.8 8.1,24 8.1,27.3 8.3,27.3 10.1,29.1 10.1,30.9 v10.5,31.3
MOTOR1_IN1  (via drill 0.3)
  Top 0.152: U1.14 22.55,35.25 22.1,34.8 21.95,34.8 20.4,33.25 20.4,31.75 v19.75,31.1 | v18.65,30 18.95,30 19,30.05 19.55,30.05 v20.95,28.65 | v23.45,28 24.75,28 26.9,25.85 26.9,24.5 30.3,21.1 31.2,21.1 31.2,21.15 v31.65,21.65 | v39.05,16.8 36.55,19.3 36.55,20.5 v35.95,21.1 | v41.6,17.35 46.55,17.35 v46.85,17.05 | v51.1,12.8 51.1,12.5 51.3,12.3 51.3,10.8 U5.27
  Bottom 0.152: v18.65,30 v19.75,31.1 | v20.95,28.65 21.6,28 v23.45,28 | v35.95,21.1 32.15,21.1 v31.65,21.65 | v39.05,16.8 39.6,17.35 v41.6,17.35 | v51.1,12.8 v46.85,17.05
MOTOR1_IN2  (via drill 0.3)
  Top 0.152: U1.15 22.25,35.75 v22.15,35.65 | v30.15,38.4 35.25,38.4 35.45,38.6 37.15,38.6 38.8,36.95 v40.35,36.95 | v53,14.8 v53,24.3 | v52.75,12.9 52.75,10.9 52.65,10.8 U5.25
  Bottom 0.152: v22.15,35.65 27.4,35.65 v30.15,38.4 | v53,24.3 v40.35,36.95 | v53,14.8 52.75,14.55 v52.75,12.9
MOTOR1_IN3  (via drill 0.3)
  Top 0.152: U1.16 24.4,36.25 24.9,36.75 29.6,36.75 30,37.15 37.7,37.15 39.4,35.45 v39.75,35.45 | v38.95,34.65 39.3,34.65 40.35,33.6 40.35,30.6 40.6,30.35 40.6,26.35 47.4,19.55 47.4,15.55 47.75,15.2 v49.8,15.2 | v51.65,13.35 52.25,13.35 52.45,13.55 52.95,13.55 53.9,12.6 53.9,10.8 U5.23
  Bottom 0.152: v38.95,34.65 v39.75,35.45 | v51.65,13.35 v49.8,15.2
MOTOR2_IN1  (via drill 0.3)
  Top 0.152: U1.56 17.25,27.7 16.9,27.7 16.3,28.3 17.15,29.15 18.55,29.15 18.95,29.5 v19.25,29.5 | v33.7,27.8 33.7,18.95 33.6,18.85 33.6,16.75 35.6,14.75 v35.6,14.05 | v34.2,12.1 34.2,11.7 33.95,11.45 33.95,10.8 U6.27
  Bottom 0.152: v19.25,29.5 20.4,30.65 20.4,31.65 23.7,31.65 24.1,31.25 27.45,31.25 32,27.8 v33.7,27.8 | v35.6,14.05 34.2,12.65 v34.2,12.1
MOTOR2_IN2  (via drill 0.3)
  Top 0.152: U1.57 17.75,25.2 17.4,24.85 17.4,23.85 17.8,23.45 18.5,23.45 18.95,23 v19.4,23 | v23.85,20.9 25.75,20.9 32.25,14.4 32.5,14.4 34.15,12.75 34.5,12.75 35.2,12.05 35.2,10.8 U6.25
  Bottom 0.152: v19.4,23 21.5,20.9 v23.85,20.9
MOTOR2_IN3  (via drill 0.3)
  Top 0.152: U1.61 19.75,25.95 19.8,25.9 19.8,25.15 v19.5,24.85 | v24.45,25.1 24.45,24.75 27.9,21.3 29.05,21.3 30.75,19.6 30.75,18.8 v32.6,16.95 | v33.7,15.85 33.7,15.15 36.5,12.35 36.5,10.8 U6.23
  Bottom 0.152: v19.5,24.85 19.75,25.1 v24.45,25.1 | v33.7,15.85 v32.6,16.95
MOTOR_D1  (via drill 0.3)
  Top 0.152: U1.3 24.15,29.75 25.8,28.1 v25.9,28.1 | v24.75,27.2 24.75,25.6 25,25.6 25,24.7 26.8,22.9 27.45,22.9 v27.45,22.55 | v24.45,19.55 21.9,19.55 21.6,19.25 21.6,14.9 v21.75,14.75 | v17.95,7.15 17.95,5.05 18.5,4.5 19.55,4.5 20.15,5.1 20.15,5.4 U4.26
  Bottom 0.152: v25.9,28.1 25.45,27.65 25.45,27.2 v24.75,27.2 | v24.45,19.55 v27.45,22.55 | v21.75,14.75 17.95,10.95 v17.95,7.15
MOTOR_EN  (via drill 0.3)
  Top 0.152: U1.33 11.75,36.4 v12.25,36.9 | v3.9,29.9 5.1,28.7 v5.1,23.9 | v5.35,22.1 5.35,18.85 5.55,18.65 v5.55,13.5 | 5.55,9.4 5.55,4.5 ARM.2 | 5.55,9.4 v5.55,12.4 | v24.9,13.55 24.95,13.5 24.95,12.45 U4.10 | v23.25,13.6 22.1,13.6 20.8,14.9 17.3,14.9 16.3,13.9 15.95,13.9 15.35,13.3 15.35,12.15 v15.4,12.1 | v14.1,11.55 10.8,11.55 9.7,10.45 9.7,9.95 9.15,9.4 5.55,9.4
  Bottom 0.152: v12.25,36.9 6.35,31 5,31 v3.9,29.9 | v5.1,23.9 5.35,23.65 v5.35,22.1 | v5.55,12.4 v5.55,13.5 | v24.9,13.55 24.85,13.6 v23.25,13.6 | v15.4,12.1 14.85,11.55 v14.1,11.55
MOTOR_FB  (via drill 0.3)
  Top 0.152: U1.8 22.65,32.25 22.15,31.75 v22.15,31.1 | v31.7,27.25 31.7,24 33.15,22.55 33.15,16.7 v31.95,15.5 | v29.95,13.55 28.5,12.1 28.3,12.1 R14.P$2
  Top 0.406: U4.8 27.37,11.32 R14.P$2
  Bottom 0.152: v22.15,31.1 22.35,30.9 27.05,30.9 v31.7,27.25 | v31.95,15.5 30,13.55 v29.95,13.55
MOTOR_SF  (via drill 0.3)
  Top 0.152: R13.P$1 17.15,7.15 17.8,7.8 | 17.8,7.8 18.15,8.15 18.15,8.4 18.65,8.9 19.05,8.9 U4.21 | U1.54 16.25,26.15 16.75,25.65 v17,25.65 | v15.45,24.5 15.45,22.4 14.8,21.75 14.8,15.85 14.85,15.8 14.85,9.6 v14.7,9.45 | v16,9.05 16.55,9.05 17.8,7.8
  Bottom 0.152: v17,25.65 16.8,25.45 16.4,25.45 v15.45,24.5 | v14.7,9.45 15.1,9.05 v16,9.05
N$1
  Top 0.152: U8.P$3 13.45,12.5 13.8,12.85 J2.6
N$2
  Top 0.406: U4.12 U4.13 U4.14 U4.15
  Top 0.61: J2.3 17.03,10.33 17.9,11.1 17.9,13.4 18.4,14.3 20.6,14.3 21.77,13.13 U4.14
N$3
  Top 0.406: U4.30 U4.29 U4.28 U4.27
  Top 0.55: 16.4,4.5 16.4,7.76
  Top 0.61: 16.4,4.5 18,3.85 21.07,3.85 21.75,4.32 21.75,4.45 U4.28
  Top 1.016: 16.4,7.76 J2.1
N$5
  Top 0.406: U4.32 24.97,4.28 C21.P$2
N$6
  Top 0.254: 53.27,1.99 M1.1
  Top 0.406: U5.5 53.27,1.99
N$7
  Top 0.406: U5.8 55.23,2.58 M1.2
N$8
  Top 0.254: 58.5,1.84 M1.3
  Top 0.406: U5.9 55.88,4.33 56.9,3.3 57.9,3.3 58.5,2.7 58.5,1.84
N$9
  Top 0.406: M2.1 35.88,1.89 U6.5
N$10
  Top 0.406: M2.2 37.83,2.48 U6.8
N$11
  Top 0.406: M2.3 38.48,4.37 U6.9
N$12
  Top 0.61: USBI.1 USBO.1
N$13
  Top 0.61: USBI.2 USBO.2
N$14
  Top 0.61: USBI.3 USBO.3
N$15
  Top 0.61: USBI.4 USBO.4
N$16
  Top 0.305: U2.7 41.75,35 L1.P$1
N$17
  Top 0.254: U3.1 U3.16 U3.15 53.05,25.25 53.1,25.2
  Top 0.813: 53.1,25.2 53.95,25.2 L2.2
  Top 1.016: L2.2 56.3,19.55 D4.2
N$18
  Top 0.305: U3.9 50.05,22.6 R11.P$2
N$19
  Top 0.254: C14.P$1 R12.P$1
N$20
  Top 0.254: R12.P$2 U3.7
N$21
  Top 0.305: C13.P$1 47.75,27.3 47.9,27.3 49.25,27.25 U3.4
N$22
  Top 0.305: R9.P$1 R10.P$2 49,19.85 49,23.5 49.45,23.95 U3.8
N$23
  Top 0.152: C7.P$1 15.4,39.5 14.75,38.85 U1.30
N$24  (via drill 0.3)
  Top 0.152: C6.P$1 12.35,25.35 v12.15,25.15 12.1,25.1 12.1,20.8 PGM.2 | U1.7 24.6,31.75 v25.9,33.05 | v21,34.65 21,34.3 14.3,27.6 13.2,27.6 v11.85,26.25
  Bottom 0.152: v25.9,33.05 25.45,33.5 25.45,33.75 22.5,33.75 22.45,33.7 21.95,33.7 v21,34.65 | v11.85,26.25 12.15,25.95 v12.15,25.15
N$25
  Top 0.406: C25.P$1 32,3.2 33.2,4.4 33.2,5.12 U6.1
N$26
  Top 0.406: C25.P$2 32.8,1.85 32.8,3.2 33.92,4.33 U6.2
N$27
  Top 0.305: C23.P$2 49.85,1.05 50.4,1.6 50.4,3.3 51.3,4.2 51.3,5.17 U5.2
N$28
  Top 0.305: C23.P$1 49.5,3.1 50.7,4.3 50.7,5.17 U5.1
N$29
  Top 0.305: C22.P$2 51.2,3.4 52,4.2 52,5.17 U5.3
N$30
  Top 0.406: C24.P$2 33.7,3.3 34.6,4.2 34.6,5.17 U6.3
N$31
  Top 0.152: U1.49 13.15,26.75 12.1,25.7 11.35,25.7 9.55,23.9 PGM.5
N$32  (via drill 0.3)
  Top 0.152: U1.46 10.7,29.75 v10.65,29.7 | v10.65,27.5 10.65,25.8 v10.5,25.65 | v10.5,23.5 10.5,21.2 PGM.3
  Bottom 0.152: v10.65,27.5 v10.65,29.7 | v10.5,23.5 v10.5,25.65
N$33  (via drill 0.3)
  Top 0.152: U1.60 v19.25,25.65
  Bottom 0.152: v19.25,25.65 R1.P$2
N$34  (via drill 0.3)
  Top 0.152: U1.9 24.8,32.75 26.05,34 27.75,34 30.2,36.45 37.2,36.45 38.4,35.25 38.4,31.3 v39.7,30 | R5.P$1 v41.15,29.4
  Top 0.305: R6.P$2 R5.P$1
  Bottom 0.152: v39.7,30 40.3,29.4 v41.15,29.4
N$35  (via drill 0.3)
  Top 0.152: U1.5 23.95,30.75 v24.7,30
  Bottom 0.152: C8.P$1 25.3,26.65 24.5,26.65 24.2,26.95 24.2,28.6 Q1.1 24.65,28.65 24.7,28.65 v24.7,30
N$36  (via drill 0.3)
  Top 0.152: U1.6 23.3,31.2 C9.P$1 25.1,31.25 v25.9,32.05
  Bottom 0.152: Q1.3 26.45,32.05 v25.9,32.05
N$37
  Top 0.152: D2.CATHODE 10.7,35.7 11.15,35.25 U1.35
N$38  (via drill 0.3)
  Top 0.152: U1.10 24.3,33.25 25.6,34.55 25.6,35.25 26.75,36.4 29.7,36.4 30.1,36.8 37.6,36.8 39.75,34.65 v40.1,34.65 | v39.3,33.85 39.3,31.2 40.25,30.25 40.25,22.2 39.6,21.55 39.6,14.5 R7.P$1
  Top 0.254: R8.P$2 R7.P$1
  Bottom 0.152: v39.3,33.85 v40.1,34.65
N$39
  Top 0.152: D1.ANODE 8.6,32.85 R2.P$1
N$40
  Top 0.152: D2.ANODE 8.6,35.95 R3.P$1
N$41
  Top 0.152: D3.ANODE 12.15,41.1 R4.P$1
N$42
  Top 0.152: D3.CATHODE 10.6,39.4 11.1,38.9 11.1,38.05 10.9,37.85 10.9,36 11.15,35.75 U1.34
N$43
  Top 0.152: D1.CATHODE 10.45,34.05 11.15,34.75 U1.36
PABS_SCL  (via drill 0.3)
  Top 0.152: 6.6,19.85 R16.P$1 | 6.6,19.85 5.9,19.15 5.9,18.15 v6.1,17.95 | v5,18.4 3.15,20.25 PABS.3 | U1.58 18.25,27.4 v17.8,27.85 | v13.2,21.25 13.2,17.65 10.35,14.8 7.95,14.8 7.3,15.45 7.3,19.15 6.6,19.85
  Bottom 0.152: v6.1,17.95 5.65,18.4 v5,18.4 | v17.8,27.85 13.65,23.7 13.65,21.25 v13.2,21.25
PABS_SDA  (via drill 0.3)
  Top 0.152: v7.3,21.05 R15.P$1 | v4,21.55 2.15,21.55 PABS.2 | U1.59 18.75,27.7 18.05,28.4 v17.2,28.4 | v15.75,29.85 14.2,28.3 14.2,28.25 13.9,27.95 12.75,27.95 11.75,26.95 v11.2,26.95 | v10.1,26.95 9.7,26.95 9.65,27 8.75,27 5.9,24.15 v5.9,23.95
  Bottom 0.152: v7.3,21.05 6.8,21.55 5.9,21.55 | v4,21.55 5.9,21.55 | v15.75,29.85 v17.2,28.4 | v10.1,26.95 v11.2,26.95 | 5.9,21.55 v5.9,23.95
PIMU_SCL  (via drill 0.3)
  Top 0.152: R18.P$1 6.6,30.45 v7.4,29.65 | 4.95,29.65 v5.5,29.65 | 4.95,29.65 4.05,30.55 PI.3 | U1.41 12.35,32.25 13.15,31.45 13.15,31.3 13.5,30.95 13.5,29.15 12.4,28.05 6.5,28.05 4.95,29.6 4.95,29.65
  Bottom 0.152: v5.5,29.65 v7.4,29.65
PIMU_SDA  (via drill 0.3)
  Top 0.152: R17.P$1 6.6,31.65 7.55,30.7 v7.55,30.45 | v8.6,31.5 8.6,31.75 9.15,32.3 9.15,33 9.3,33.15 10.75,33.15 11.15,32.75 U1.40 | PI.2 3.75,32.05 v5.35,30.45
  Bottom 0.152: v8.6,31.5 v7.55,30.45 v5.35,30.45
SIMU_SCL  (via drill 0.3)
  Top 0.152: v7.3,10.65 R20.P$1 6.75,10.2 5.9,11.05 5.9,11.85 6.05,12 6.75,12 v8.55,13.8 | v4,10.15 2.15,10.15 SIMU.3 | v15.25,36.4 U1.29 | v16.35,34.7 16.35,31.25 13.65,28.55 v13.65,28.5 | v12.65,22.1 12.65,17.9 v10.5,15.75
  Bottom 0.152: v7.3,10.65 6.8,10.15 v4,10.15 | v15.25,36.4 14.95,36.1 v16.35,34.7 | v13.65,28.5 13.65,24.15 12.55,23.05 12.55,22.1 v12.65,22.1 | v10.5,15.75 10.3,15.55 10.3,13.8 v8.55,13.8
SIMU_SDA  (via drill 0.3)
  Top 0.152: R19.P$1 v7.55,11.45 7.5,11.5 v14.25,18.25 | SIMU.2 v5,11.45 | U1.62 20.25,25.95 20.2,25.9 v20.2,24.45 | v20.2,23 20.2,20.25 18.4,18.45 v15.35,18.45
  Bottom 0.152: v5,11.45 v7.55,11.45 | v20.2,23 v20.2,24.45 | v15.35,18.45 15.15,18.25 v14.25,18.25
SLAVE_RX  (via drill 0.3)
  Top 0.152: v12.95,33.75 U1.38 | v14.05,33.75 15.55,35.25 20.65,35.25 v21.75,36.35 | v23.4,38 24.75,38 24.9,37.85 27,37.85 v27.15,38 | v29.6,38.95 37.6,38.95 v37.8,38.75 | v38.85,37.7 40.9,37.7 41.7,36.9 v42.4,36.9 | v47.5,33.8 v44.4,36.9 | v50,33.7 50.35,33.7 J1.3
  Bottom 0.152: v14.05,33.75 v12.95,33.75 | v23.4,38 v21.75,36.35 | v27.15,38 28.1,38.95 v29.6,38.95 | v38.85,37.7 v37.8,38.75 | v44.4,36.9 v42.4,36.9 | v47.5,33.8 47.6,33.7 v50,33.7
SLAVE_TX  (via drill 0.3)
  Top 0.152: U1.37 12.35,34.25 v12.95,34.85 | v13.95,35.85 19.35,35.85 v19.4,35.8 | v37.8,39.55 v30.1,39.55 | v44.65,37.85 45,37.5 v47.55,37.5 | v49.85,37.45 53.65,33.65 J1.2
  Bottom 0.152: v13.95,35.85 v12.95,34.85 | v19.4,35.8 21.8,38.2 22.8,38.2 23.45,38.85 24.8,38.85 25.5,39.55 v30.1,39.55 | v37.8,39.55 39.5,37.85 v44.65,37.85 | v47.55,37.5 47.6,37.45 v49.85,37.45
USB_DM
  Top 0.16: USB.2 5.25,36.95 5.7,36.5 6.9,36.5 7.65,35.7 7.65,31.55 8.55,30.75 U1.44
USB_DP
  Top 0.16: USB.3 4.6,37 5.5,36.1 6.7,36.1 7.3,35.5 7.3,31.4 8.45,30.4 10.8,30.4 10.95,30.25 U1.45
USB_VBUS  (via drill 0.3)
  Top 0.152: U1.42 12.35,31.75 12.8,31.3 12.8,30.85 v12.95,30.7 | v14.05,30.85 13.5,31.4 13.5,35.5 12.8,36.2 12.8,37.8 v12,38.6 | v10.45,38.55 6.75,38.55 5.9,37.7 USB.1
  Bottom 0.152: v12.95,30.7 13.1,30.85 v14.05,30.85 | v12,38.6 11.95,38.55 v10.45,38.55

## Text on the board
tPlace: mjmech gimbal v3 | (c) 2016 / jjp@pobox.com | L | E | T